# Altium PCB BMS.PcbDoc (part 2 of 2)
Units mil, origin at the board's own origin, x right, y up, seen from the top; angles counter-clockwise.
Board outline 1940 x 2890 mil, 2 copper layers (Top Layer, Bottom Layer); 210 components, 157 nets, 682 pads, 299 vias.
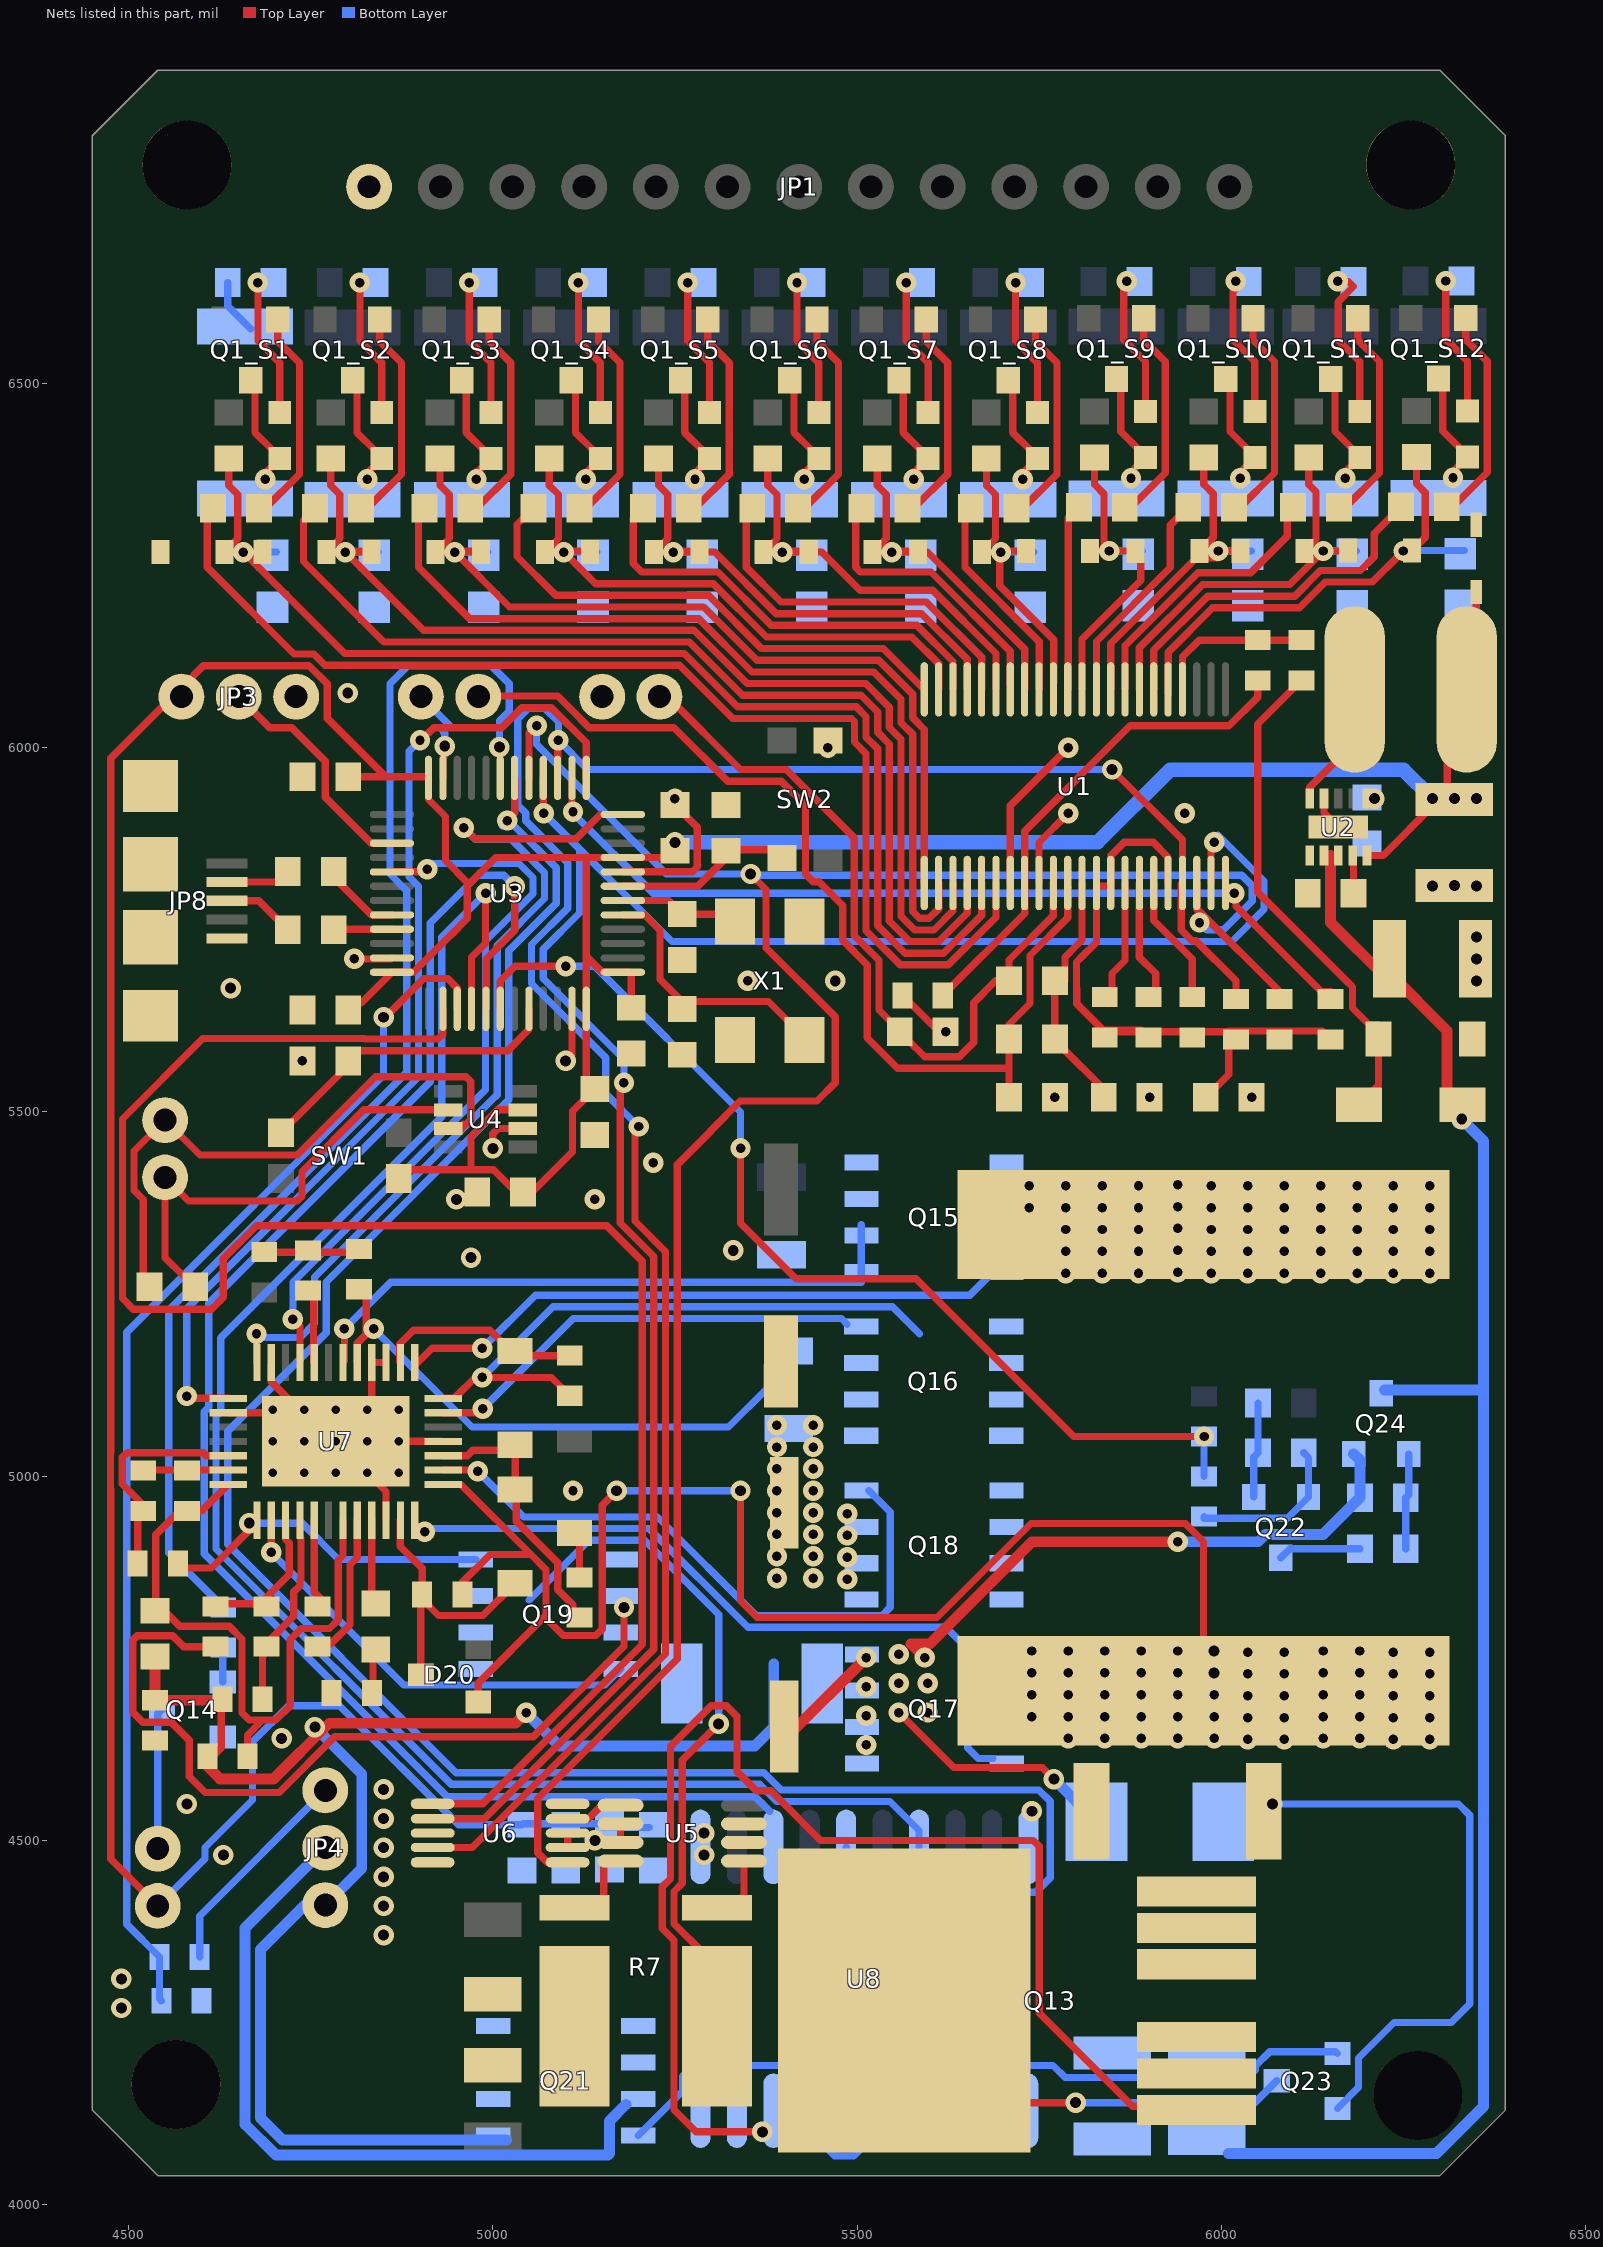
[diagram p2: the nets of this part, all layers, seen from the top]

## Via types
v1: diameter 28, hole 13, Top Layer to Bottom Layer, 232 vias
v2: diameter 28, hole 15, Top Layer to Bottom Layer, 52 vias
v3: diameter 23.62, hole 11.81, Top Layer to Bottom Layer, 15 vias

## Nets (pads, with @x,y where several pads share a name; then routed paths per layer and width w, separated by ;. In a path a pad name is that pad's centre, name@x,y a point inside that pad or via, vN(x,y) a via of type N, cw(c..) or ccw(c..) an arc to the next point about the centre after c; other vN are vias at no path point) (continued)
GND: C1.1 C1_S1.2 C1_S2.2 C1_S3.2 C1_S4.2 C1_S5.2 C1_S6.2 C1_S7.2 C1_S8.2 C1_S9.2 C1_S10.2 C1_S11.2 C1_S12.2 C3.1 C4.1 C5.1 C6.2 C7.2 C8.2 C9.1 C10.2 C11.1 C12.1 C13.1 C14.1 C22.1 C23.2 C24.2 C25.1 C26.1 C30.1 C31.1 C33.2 C34.2 C35.1 C37.2 C41.1 C42.1 C43.1 C45.2 C46.1 C47.1 D1.2 D1_S1.2 D5.2 D17.2 JP1.1 JP3.3 JP6.1 JP7.1 JP8.GND JP8.MT1 JP8.MT2 JP8.P$1 JP8.P$2 pad.2@4565,4165 pad.2@4580,6800 pad.2@6260,6800 Q14.3 Q18.1 Q22.3 R5.2 R11.1 R13_S1.2 R14_S1.1 R49.2 R51.1 R53.1 R64.1 R66.1 SW2.4 U1.29 U1.31 U2.1 U2.9 U2.11 U3.8 U3.23 U3.35 U3.47 U4.2 U5.2 U5.3 U6.4 U6.5 U6.7 U7.3 U7.4 U7.11 U7.14 U7.29 U7.35 U7.39 U8.1 U8.10 X1.2 | length 2191.8
  Top Layer w10: U7.14@4636.8,5087.13 U7.39@4738.36,5087.13 ; C42.1@4686.26,5307.5 4809.25,5307.5 C34.2@4816.26,5314.51 ; U7.11@4695.85,5153.08 4695.85,5129.64 U7.39@4738.36,5087.13 ; U7.39@4743.31,5047.76 U7.39@4777.73,5047.76 ; v1(4810,5710) 4860.12,5710 U3.35@4861.54,5711.42 ; U7.29@4853.33,4939.49 4853.33,4978.86 v3(4827.74,5004.45) v3(4784.43,5047.76) ; U7.3@4853.33,5156.02 U7.4@4833.65,5156.02 4833.65,5096.97 v3(4827.74,5091.06) v3(4784.43,5047.76) ; U7.35@4929.13,5047.76 v3(4871.05,5047.76) v3(4827.74,5047.76) v3(4784.43,5047.76) ; U3.23@4931.42,5958.47 4931.42,5986.89 4934,5989.47 v2(4934,6002.2) ; v2(5000,5450) 5000,5470 5007.2,5477.2 U4.2@5041.18,5477.2 ; v2(5100,5570) 5108.58,5578.58 U3.47@5108.58,5641.54 ; D17.2@5112.07,4922.01 5119.08,4915 C35.1@5119.08,4861.14 ; U3.8@5178.46,5829.53 5273.98,5829.53 5280.69,5836.23 5280.69,5890.81 C47.1@5250,5921.5 ; R11.1@5562.44,5660 5612.44,5610 v1(5621.5,5610) ; U1.29@5710.33,5814.25 5710.33,5920.33 v1(5790,6000) ; U1.31@5749.78,5814.25 5749.78,5869.78 v1(5790,5910) ; U2.9@6140.94,5930 6140.94,5910.71 U2.11@6160.63,5891.02 ; U7.39@4738.36,5087.13 U7.39@4777.73,5047.76 ; U7.39@4777.73,5047.76 v3(4784.43,5047.76)
  Bottom Layer w10: R14_S1.1@4636,6638.5 4636,6606.22 R13_S1.2@4667.5,6574.72 ; JP7.1@4901.26,6070 4940,6031.26 4931.42,6022.68 4934,6020.1 v2(4934,6002.2) ; R51.1@5976.26,4944.46 5976.26,4942.39 6090.69,4942.39 Q22.3@6119.69,4971.39 6119.69,5025.51 R66.1@6113.19,5032.02
  other v1: 5486.26,4858.59 5390,4860 5440,4860 5486.26,4888.59 5390,4890 5440,4890 5486.26,4918.59 5390,4920 5440,4920 5486.26,4948.59 5390,4950 5440,4950 5110,4980 5390,4980 5440,4980 5390,5010 5440,5010 5390,5040 5440,5040 5390,5070 5440,5070 5140,5380 5220,5430 5771.5,5520 5901.5,5520 6041.5,5520 4738.5,5570 5350,5680 5950,5910 5250,5930 5460,6000
  other v2: 4490,4270 4490,4310 4850,4370 4850,4410 4850,4450 4630,4480 5290,4480 4850,4490 5290,4510 4850,4530 5740,4540 4580,4550 4850,4570 4710,4640 4970,5300 5330,5310 4950,5380 4640,5670 5470,5680 6350,5680 6350,5710 6350,5740 6290,5810 6350,5810 6320,5810.94 4800.83,6075
  other v3: 4697.82,5004.45 4741.13,5004.45 4784.43,5004.45 4871.05,5004.45 4697.82,5047.76 4741.13,5047.76 4697.82,5091.06 4741.13,5091.06 4784.43,5091.06 4871.05,5091.06
L+: Q13.3 R68.1
LOAD_GATE: Q13.1 U8.18 | length 1795.6
  Top Layer w10: v2(5370,4100) 5278.77,4100 5248.61,4130.17 5248.61,4363.05 5232.61,4379.05 5232.61,4436.46 5244,4447.85 5244,4629.36 5299.64,4685 5320.36,4685 5335,4670.36 5335,4595 5361.76,4568.24 5381.76,4568.24 5450,4500 5741.93,4500 5750,4491.93 5750,4262.96 5877.96,4135 Q13.1@5966.06,4135
NetC1_S1_1: C1_S1.1 D1_S1.1 D1_S2.2 R1_S1.1 U1.27 | length 1705.3
  Top Layer w10: R1_S1.1@4637.5,6397.01 4637.5,6359.83 4638.14,6359.19 4638.27,6359.19 4650,6347.46 4650,6287.11 D1_S1.1@4631.39,6268.5 v1(4657.5,6268.5) ; D1_S2.2@4683.6,6268.5 v1(4657.5,6268.5) ; U1.27@5670.96,5814.25 5670.96,5770.11 5618.7,5717.85 5565.74,5717.85 5528.22,5755.37 5528.22,5998.49 5512.3,6014.42 5512.3,6042.45 5498.75,6056 5335.95,6056 5262.79,6129.17 4796.83,6129.17 v1(4657.5,6268.5)
  Bottom Layer w10: v1(4657.5,6268.5) C1_S1.1@4702.93,6268.5
NetC1_S2_1: C1_S2.1 D1_S2.1 D1_S3.2 R1_S2.1 U1.25 | length 1558.6
  Top Layer w10: R1_S2.1@4777.5,6397.01 4777.5,6359.83 4778.14,6359.19 4778.27,6359.19 4790,6347.46 4790,6287.11 D1_S2.1@4771.39,6268.5 v1(4797.5,6268.5) ; D1_S3.2@4832.1,6270 4798.99,6270 v1(4797.5,6268.5) ; D1_S3.2@4833.6,6268.5 v1(4797.5,6268.5) ; U1.25@5631.59,5791.37 U1.25@5631.59,5814.25 5631.59,5776 5605.44,5749.85 5579,5749.85 5560.22,5768.63 5560.22,6011.75 5544.3,6027.67 5544.3,6055.7 5512,6088 5349.21,6088 5276.04,6161.17 4904.83,6161.17 v1(4797.5,6268.5)
  Bottom Layer w10: v1@4802.93,6268.5 C1_S2.1@4842.93,6268.5
NetC1_S3_1: C1_S3.1 D1_S3.1 D1_S4.2 R1_S3.1 U1.23 | length 1254.2
  Top Layer w10: R1_S3.1@4927.5,6397.01 4927.5,6359.83 4928.14,6359.19 4928.27,6359.19 4940,6347.46 4940,6287.11 D1_S3.1@4921.39,6268.5 v1(4947.5,6268.5) ; D1_S4.2@4982.1,6270 4948.99,6270 v1(4947.5,6268.5) ; D1_S4.2@4983.6,6268.5 v1(4947.5,6268.5) ; U1.23@5592.22,5814.25 5592.22,6025 5576.3,6040.93 5576.3,6073.29 5529.59,6120 5362.46,6120 5289.3,6193.17 5022.83,6193.17 v1(4947.5,6268.5)
  Bottom Layer w10: v1@4952.93,6268.5 C1_S3.1@4992.93,6268.5
NetC1_S4_1: C1_S4.1 D1_S4.1 D1_S5.2 R1_S4.1 U1.21 | length 856
  Top Layer w10: R1_S4.1@5077.5,6397.01 5077.5,6359.83 5078.14,6359.19 5078.27,6359.19 5090,6347.46 5090,6287.11 D1_S4.1@5071.39,6268.5 v1(5097.5,6268.5) ; D1_S5.2@5132.1,6270 5098.99,6270 v1(5097.5,6268.5) ; U1.21@5611.91,6080 5611.91,6115.31 5575.22,6152 5375.72,6152 5302.55,6225.17 5140.83,6225.17 v1(5097.5,6268.5)
  Bottom Layer w10: v1@5102.93,6268.5 C1_S4.1@5142.93,6268.5
NetC1_S5_1: C1_S5.1 D1_S5.1 D1_S6.2 R1_S5.1 U1.19 | length 748.8
  Top Layer w10: R1_S5.1@5227.5,6397.01 5227.5,6359.83 5228.14,6359.19 5228.27,6359.19 5240,6347.46 5240,6287.11 D1_S5.1@5221.39,6268.5 v1(5247.5,6268.5) ; D1_S6.2@5282.1,6270 5248.99,6270 v1(5247.5,6268.5) ; U1.19@5651.28,6080 5651.28,6121.2 5588.47,6184 5388.97,6184 5304.47,6268.5 v1(5247.5,6268.5)
  Bottom Layer w10: v1@5252.93,6268.5 C1_S5.1@5292.93,6268.5
NetC1_S6_1: C1_S6.1 D1_S6.1 D1_S7.2 R1_S6.1 U1.17 | length 642.9
  Top Layer w10: R1_S6.1@5377.5,6397.01 5377.5,6359.83 5378.14,6359.19 5378.27,6359.19 5390,6347.46 5390,6287.11 D1_S6.1@5371.39,6268.5 v1(5397.5,6268.5) ; D1_S7.2@5432.1,6270 5398.99,6270 v1(5397.5,6268.5) ; U1.17@5690.65,6080 5690.65,6129.35 5604,6216 5504,6216 5451.5,6268.5 v1(5397.5,6268.5)
  Bottom Layer w10: v1@5402.93,6268.5 C1_S6.1@5442.93,6268.5
NetC1_S7_1: C1_S7.1 D1_S7.1 D1_S8.2 R1_S7.1 U1.15 | length 535.8
  Top Layer w10: R1_S7.1@5527.5,6397.01 5527.5,6359.83 5528.14,6359.19 5528.27,6359.19 5540,6347.46 5540,6287.11 D1_S7.1@5521.39,6268.5 v1(5547.5,6268.5) ; D1_S8.2@5582.1,6270 5548.99,6270 v1(5547.5,6268.5) ; U1.15@5730.02,6080 5730.02,6135.24 5596.75,6268.5 v1(5547.5,6268.5)
  Bottom Layer w10: v1@5552.93,6268.5 C1_S7.1@5592.93,6268.5
NetC1_S8_1: C1_S8.1 D1_S8.1 D1_S9.2 R1_S8.1 U1.13 | length 452.6
  Top Layer w10: R1_S8.1@5677.5,6397.01 5677.5,6359.83 5678.14,6359.19 5678.27,6359.19 5690,6347.46 5690,6287.11 D1_S8.1@5671.39,6268.5 v1(5697.5,6268.5) ; D1_S9.2@5732.1,6270 5698.99,6270 v1(5697.5,6268.5) ; U1.13@5770,6090 5770,6148.23 5696,6222.23 5696,6267.01 v1(5697.5,6268.5)
  Bottom Layer w10: v1@5702.93,6268.5 C1_S8.1@5742.93,6268.5
NetC1_S9_1: C1_S9.1 D1_S9.1 D1_S10.2 R1_S9.1 U1.11 | length 526.9
  Top Layer w10: U1.11@5808.76,6080 5808.76,6148.76 5889.5,6229.5 5889.5,6262.6 D1_S10.2@5882.1,6270 v1(5846,6270) D1_S9.1@5819.9,6270 5838.78,6270 5838.78,6348.68 5826.78,6360.69 5826.64,6360.69 5826,6361.33 R1_S9.1@5826,6398.5
  Bottom Layer w10: C1_S9.1@5886,6270 v1(5846,6270) C1_S9.1@5891.43,6270
NetC1_S10_1: C1_S10.1 D1_S10.1 D1_S11.2 R1_S10.1 U1.9 | length 507
  Top Layer w10: U1.9@5848.13,6080 5848.13,6142.87 5965.5,6260.24 5996,6260.24 v1(5996,6270) ; R1_S10.1@5976,6398.5 5976,6361.33 5976.64,6360.69 5976.78,6360.69 5988.78,6348.68 5988.78,6288.88 D1_S10.1@5969.9,6270 v1(5996,6270) ; D1_S11.2@6026.1,6270 v1(5996,6270)
  Bottom Layer w10: v1@6001.43,6270 C1_S10.1@6041.43,6270
NetC1_S11_1: C1_S11.1 D1_S11.1 D1_S12.2 R1_S11.1 U1.7 | length 604.4
  Top Layer w10: U1.7@5887.5,6080 5887.5,6136.99 5974.51,6224 6094,6224 v1(6140,6270) ; R1_S11.1@6120,6398.5 6120,6361.33 6120.64,6360.69 6120.78,6360.69 6130,6351.46 6130,6286.1 D1_S11.1@6113.9,6270 v1(6140,6270) ; D1_S12.2@6174.1,6270.63 6173.47,6270 v1(6140,6270)
  Bottom Layer w10: v1@6145.43,6270 C1_S11.1@6185.43,6270
NetC1_S12_1: C1_S12.1 D1_S12.1 R1_S12.1 U1.5 | length 687.4
  Top Layer w10: U1.5@5926.79,6073.21 5926.94,6073.37 5926.94,6131.18 5987.76,6192 6107.25,6192 6142.55,6227.29 6207.29,6227.29 6243.5,6263.5 6254.77,6263.5 D1_S12.1@6261.9,6270.63 ; v1(6250,6270) 6261.27,6270 D1_S12.1@6261.9,6270.63 ; R1_S12.1@6268,6399.13 6268,6361.96 6268.64,6361.32 6268.78,6361.32 6280,6350.09 6280,6288.73 D1_S12.1@6261.9,6270.63
  Bottom Layer w10: v1@6250,6270.63 C1_S12.1@6333.43,6270.63
NetC2_2: C2.2 R8.1 U1.4 | length 213.2
  Top Layer w10: U1.4@5946.55,6070.35 U1.4@5946.55,6080 5946.55,6124.64 5969.47,6147.56 R8.1@6096,6147.56
NetC5_2: C5.2 R4.2 R6.2 U1.34 | length 358.2
  Top Layer w10: U1.34@5808.76,5814.25 5808.76,5735.86 5801.23,5728.34 5801.1,5728.34 5785.28,5712.52 5785.28,5680 R6.2@5771.5,5680 5771.5,5598.5 5848.5,5521.5 C5.2@5838.5,5521.5
NetC8_1: C8.1 U2.6
  other v2: 6210,5930
NetC10_1: C10.1 U2.4 | length 52.5
  Top Layer w10: U2.4@6180.31,5852.05 6181.5,5850.87 C10.1@6181.5,5800
NetC23_1: C23.1 U3.5 X1.1 | length 372
  Top Layer w10: U3.5@5178.46,5770.47 5208.06,5770.47 5229.41,5749.13 5229.41,5730.87 5229.31,5730.78 5229.31,5686.23 5229.41,5686.14 5229.41,5682.09 C23.1@5260,5651.5 ; C23.1@5260,5641.5 C23.1@5260,5651.5 ; X1.1@5427.5,5598.5 5427.5,5602.5 5378.5,5651.5 C23.1@5260,5651.5
NetC24_1: C24.1 U3.6 X1.3 | length 165.9
  Top Layer w10: U3.6@5178.46,5790.16 5241.34,5790.16 C24.1@5260,5771.5 5322.5,5771.5 X1.3@5332.5,5761.5
NetC25_2: C25.2 SW2.1 U3.7 | length 246.6
  Top Layer w10: U3.7@5178.46,5809.84 5281.34,5809.84 5315,5843.5 5315,5850.75 5324.25,5860 SW2.1@5400,5860
NetC32_1: C32.1 D3.1 U7.2 | length 289.9
  Top Layer w10: U7.2@4873.02,5156.02 4872.07,5156.97 4872.07,5181.46 4891.1,5200.49 4995.93,5200.49 5010.57,5185.85 5010.57,5171.81 D3.1@5030.57,5171.81 5036.89,5165.49 C32.1@5105.57,5165.49
NetC32_2: C32.2 L3.1 Q15.1 Q16.3 U7.38 | length 852.5
  Top Layer w10: U7.38@4932.07,5106.81 4949.08,5106.81 4949.08,5108.94 4975.63,5135.49 5080.46,5135.49 C32.2@5105.57,5110.37
  Bottom Layer w10: v1(4985.57,5135.49) 5082.47,5232.39 5548.68,5232.39 5585.57,5195.49
  other v1: 5786.26,5278.59 5836.26,5278.59 5886.26,5278.59 5986.26,5278.59 6036.26,5278.59 6086.26,5278.59 6136.26,5278.59 6186.26,5278.59 6236.26,5278.59 6286.26,5278.59 5940,5280 5786.26,5308.59 5836.26,5308.59 5886.26,5308.59 5986.26,5308.59 6036.26,5308.59 6086.26,5308.59 6136.26,5308.59 6186.26,5308.59 6236.26,5308.59 6286.26,5308.59 5940,5310 5786.26,5338.59 5836.26,5338.59 5886.26,5338.59 5986.26,5338.59 6036.26,5338.59 6086.26,5338.59 6136.26,5338.59 6186.26,5338.59 6236.26,5338.59 6286.26,5338.59 5940,5340 5736.26,5368.59 5786.26,5368.59 5836.26,5368.59 5886.26,5368.59 5986.26,5368.59 6036.26,5368.59 6086.26,5368.59 6136.26,5368.59 6186.26,5368.59 6236.26,5368.59 6286.26,5368.59 5940,5370 5736.26,5398.59 5786.26,5398.59 5836.26,5398.59 5886.26,5398.59 5986.26,5398.59 6036.26,5398.59 6086.26,5398.59 6136.26,5398.59 6186.26,5398.59 6236.26,5398.59 6286.26,5398.59 5940,5400
NetC34_1: C34.1 Q16.1 R53.2 U7.5 | length 757.1
  Top Layer w10: U7.5@4813.96,5156.02 4813.96,5182.41 4826.26,5194.71 4826.26,5243.88 C34.1@4816.26,5253.88
  Bottom Layer w10: v1(4836.26,5202.39) 4971.26,5067.39 5323.56,5067.39 5376.26,5120.08 5376.26,5152.39
NetC35_2: C35.2 D3.2 D19.2 U7.34 | length 378.4
  Top Layer w10: U7.34@4932.07,5028.07 4965.09,5028.07 4972.51,5035.49 5023,5035.49 D3.2@5030.57,5043.07 D19.2@5030.57,4981.81 5032.01,4980.37 5032.01,4938.14 5089.08,4881.07 5089.08,4844.09 5109.59,4823.58 5109.59,4815.52 C35.2@5119.08,4806.02
NetC36_1: C36.1 U7.24 | length 121
  Top Layer w10: U7.24@4754.91,4939.49 4754.91,4840.67 C36.1@4770.57,4825
NetC36_2: C36.2 U7.27 | length 191.6
  Top Layer w10: C36.2@4770.57,4769.88 4777.5,4769.88 4803.8,4796.18 4803.8,4878.1 4813.96,4888.27 U7.27@4813.96,4939.49
NetC37_1: C37.1 R54.2 | length 73.4
  Top Layer w10: R54.2@4832.07,4767.44 4835.57,4763.94 C37.1@4835.57,4695.49
NetC38_1: C38.1 R59.1 U7.22 | length 183.1
  Top Layer w10: R59.1@4630.57,4825 4680.5,4825 4720.57,4865.08 4720.57,4908.07 4715.54,4913.1 U7.22@4715.54,4939.49
NetC38_2: C38.2 R58.1 U7.23 | length 268
  Top Layer w10: R58.1@4683.82,4693.88 4683.82,4752.89 4689.08,4758.15 4689.08,4770.15 4726.85,4807.92 4726.85,4841.35 4735.22,4849.72 4735.22,4857.1 4736.57,4858.45 4736.57,4914.69 4735.22,4916.05 U7.23@4735.22,4939.49
NetC39_1: C39.1 R56.2 R57.1 U7.19 U7.26 | length 914
  Top Layer w10: U7.19@4636.8,4988.7 4600.54,4952.44 4570,4952.44 4537.22,4919.66 4537.22,4816.34 C39.1@4536.26,4815.38 4548.85,4815.38 4570.35,4793.88 4638.27,4793.88 4655.57,4776.58 4655.57,4675.07 4665.48,4665.17 4683.82,4665.17 ; R57.1@4663.13,4615.49 4663.13,4644.48 4683.82,4665.17 ; U7.26@4794.28,4939.49 4794.28,4891.21 4787.8,4884.73 4787.8,4802.81 4775.79,4790.8 4736.81,4790.8 4721.73,4775.73 4721.73,4684.74 4702.15,4665.17 4683.82,4665.17
NetC40_1: C40.1 D19.1 D20.3 U7.30 | length 386.8
  Top Layer w10: U7.30@4873.02,4939.49 4873.02,4903.58 4903.02,4873.58 C40.1@4903.02,4837.44 ; D20.3@4901.2,4727.44 4901.2,4835.63 C40.1@4903.02,4837.44 ; D19.1@5030.57,4853.07 4986.23,4808.72 4925.35,4808.72 4903.02,4831.06 C40.1@4903.02,4837.44
NetC40_2: C40.2 D4.2 D20.1 L3.2 Q17.1 Q18.3 U7.32 | length 2300.9
  Top Layer w10: U7.32@4932.07,4988.7 4956.09,4988.7 5052.4,4892.39 ; C40.2@4958.13,4837.44 4958.13,4854.26 4996.26,4892.39 5052.4,4892.39 ; D20.1@4979.94,4690.04 4979.94,4715.82 5073.08,4808.96 ; v2(5170,4980) 5150,4960 5150,4789.89 5141.35,4781.24 5096.81,4781.24 5073.08,4804.97 5073.08,4808.96 ; v2(5340,4980) 5340,4828.53 5362.63,4805.89 5609.73,4805.89 5738.84,4935 5950.36,4935 5975.57,4909.78 L3.2@5975.57,4705.49 ; v1(5740,4700) 5964.85,4700 L3.2@5956.26,4708.59 ; 5052.4,4892.39 5073.08,4871.71 5073.08,4808.96
  Bottom Layer w10: v2(5170,4980) v2(5340,4980)
  other v1: 6036.26,4638.59 6086.26,4638.59 6236.26,4638.59 6286.26,4638.59 5790,4640 5840,4640 5890,4640 5940,4640 5990,4640 6140,4640 6190,4640 6036.26,4668.59 6086.26,4668.59 6236.26,4668.59 6286.26,4668.59 5740,4670 5790,4670 5840,4670 5890,4670 5940,4670 5990,4670 6140,4670 6190,4670 6036.26,4698.59 6086.26,4698.59 6236.26,4698.59 6286.26,4698.59 5790,4700 5840,4700 5890,4700 5940,4700 5990,4700 6140,4700 6190,4700 6036.26,4728.59 6086.26,4728.59 6236.26,4728.59 6286.26,4728.59 5740,4730 5790,4730 5840,4730 5890,4730 5940,4730 6140,4730 6190,4730 6036.26,4758.59 6086.26,4758.59 6236.26,4758.59 6286.26,4758.59 5740,4760 5790,4760 5840,4760 5890,4760 5940,4760 6140,4760 6190,4760
  other v2: 5990,4730 5990,4760
NetD1_1: D1.1 L1.2 R8.2 | length 674.7
  Top Layer w10: R8.2@6110,6092.44 6050,6032.44 6050,5801.56 6172,5679.56 6172.27,5679.56 6178.72,5673.12 6178.72,5672.84 6180,5671.56 6180,5642.63 6202.63,5620 D1.1@6215.63,5620 ; L1.2@6189.13,5510 6215.63,5536.5 D1.1@6215.63,5600
NetD2_S1_1: D2_S1.1 R14_S1.2 | length 190.9
  Top Layer w10: v1(4677.5,6638.5) 4677.5,6558.5 4707.5,6528.5 D2_S1.1@4707.5,6460
NetD2_S1_2: D2_S1.2 Q1_S1.2 R13_S1.1 | length 170.2
  Top Layer w10: Q1_S1.2@4667.49,6504.5 4673.5,6504.5 4673.5,6432.5 4697.5,6408.5 D2_S1.2@4697.5,6387.01 ; v1(4687.5,6368.5) 4687.5,6377.01 D2_S1.2@4697.5,6387.01 ; D2_S1.2@4707.5,6397.01 D2_S1.2@4697.5,6387.01
NetD2_S2_1: D2_S2.1 R14_S2.2 | length 190.9
  Top Layer w10: v1(4817.5,6638.5) 4817.5,6558.5 4847.5,6528.5 D2_S2.1@4847.5,6460
NetD2_S2_2: D2_S2.2 Q1_S2.2 R13_S2.1 | length 170.2
  Top Layer w10: Q1_S2.2@4807.5,6504.5 4813.5,6504.5 4813.5,6432.5 4837.5,6408.5 D2_S2.2@4837.5,6387.01 ; v1(4827.5,6368.5) 4827.5,6377.01 D2_S2.2@4837.5,6387.01 ; D2_S2.2@4847.5,6397.01 D2_S2.2@4837.5,6387.01
NetD2_S3_1: D2_S3.1 R14_S3.2 | length 190.9
  Top Layer w10: v1(4967.5,6638.5) 4967.5,6558.5 4997.5,6528.5 D2_S3.1@4997.5,6460
NetD2_S3_2: D2_S3.2 Q1_S3.2 R13_S3.1 | length 178.7
  Top Layer w10: Q1_S3.2@4957.5,6504.5 4963.5,6504.5 4963.5,6432.5 4987.5,6408.5 D2_S3.2@4987.5,6387.01 ; v1(4977.5,6368.5) 4977.5,6377.01 D2_S3.2@4987.5,6387.01 ; v1@4978,6370.63 v1@4978,6379.13 ; D2_S3.2@4997.5,6397.01 D2_S3.2@4987.5,6387.01
NetD2_S4_1: D2_S4.1 R14_S4.2 | length 190.9
  Top Layer w10: v1(5117.5,6638.5) 5117.5,6558.5 5147.5,6528.5 D2_S4.1@5147.5,6460
NetD2_S4_2: D2_S4.2 Q1_S4.2 R13_S4.1 | length 178.7
  Top Layer w10: Q1_S4.2@5107.5,6504.5 5113.5,6504.5 5113.5,6432.5 5137.5,6408.5 D2_S4.2@5137.5,6387.01 ; D2_S4.2@5147.5,6397.01 D2_S4.2@5137.5,6387.01 ; v1@5127.5,6377.01 v1(5127.5,6368.5) v1@5127.5,6377.01 ; v1@5127.5,6377.01 D2_S4.2@5137.5,6387.01
NetD2_S5_1: D2_S5.1 R14_S5.2 | length 190.9
  Top Layer w10: v1(5267.5,6638.5) 5267.5,6558.5 5297.5,6528.5 D2_S5.1@5297.5,6460
NetD2_S5_2: D2_S5.2 Q1_S5.2 R13_S5.1 | length 170.2
  Top Layer w10: Q1_S5.2@5257.5,6504.5 5263.5,6504.5 5263.5,6432.5 5287.5,6408.5 D2_S5.2@5287.5,6387.01 ; v1(5277.5,6368.5) 5277.5,6377.01 D2_S5.2@5287.5,6387.01 ; D2_S5.2@5297.5,6397.01 D2_S5.2@5287.5,6387.01
NetD2_S6_1: D2_S6.1 R14_S6.2 | length 190.9
  Top Layer w10: v1(5417.5,6638.5) 5417.5,6558.5 5447.5,6528.5 D2_S6.1@5447.5,6460
NetD2_S6_2: D2_S6.2 Q1_S6.2 R13_S6.1 | length 178.7
  Top Layer w10: Q1_S6.2@5407.5,6504.5 5413.5,6504.5 5413.5,6432.5 5437.5,6408.5 D2_S6.2@5437.5,6387.01 ; v1@5426,6370 v1@5426,6378.5 ; v1(5427.5,6368.5) 5427.5,6377.01 D2_S6.2@5437.5,6387.01 ; D2_S6.2@5447.5,6397.01 D2_S6.2@5437.5,6387.01
NetD2_S7_1: D2_S7.1 R14_S7.2 | length 190.9
  Top Layer w10: v1(5567.5,6638.5) 5567.5,6558.5 5597.5,6528.5 D2_S7.1@5597.5,6460
NetD2_S7_2: D2_S7.2 Q1_S7.2 R13_S7.1 | length 187.2
  Top Layer w10: Q1_S7.2@5557.5,6504.5 5563.5,6504.5 5563.5,6432.5 5587.5,6408.5 D2_S7.2@5587.5,6387.01 ; v1@5576,6370 v1@5576,6378.5 ; D2_S7.2@5597.5,6397.01 D2_S7.2@5587.5,6387.01 ; v1@5577.5,6377.01 v1(5577.5,6368.5) v1@5577.5,6377.01 ; v1@5577.5,6377.01 D2_S7.2@5587.5,6387.01
NetD2_S8_1: D2_S8.1 R14_S8.2 | length 190.9
  Top Layer w10: v1(5717.5,6638.5) 5717.5,6558.5 5747.5,6528.5 D2_S8.1@5747.5,6460
NetD2_S8_2: D2_S8.2 Q1_S8.2 R13_S8.1 | length 178.7
  Top Layer w10: Q1_S8.2@5707.5,6504.5 5713.5,6504.5 5713.5,6432.5 5737.5,6408.5 D2_S8.2@5737.5,6387.01 ; v1@5726,6370 v1@5726,6378.5 ; v1(5727.5,6368.5) 5727.5,6377.01 D2_S8.2@5737.5,6387.01 ; D2_S8.2@5747.5,6397.01 D2_S8.2@5737.5,6387.01
NetD2_S9_1: D2_S9.1 R14_S9.2 | length 194.8
  Top Layer w10: v1(5870,6640) 5866.14,6640 5866.07,6639.93 5866.07,6559.93 5896,6530 D2_S9.1@5896,6461.5
NetD2_S9_2: D2_S9.2 Q1_S9.2 R13_S9.1 | length 170.2
  Top Layer w10: Q1_S9.2@5856,6506 5862,6506 5862,6434 5886,6410 D2_S9.2@5886,6388.5 ; v1(5876,6370) 5876,6378.5 D2_S9.2@5886,6388.5 ; D2_S9.2@5896,6398.5 D2_S9.2@5886,6388.5
NetD2_S10_1: D2_S10.1 R14_S10.2 | length 192.6
  Top Layer w10: v1(6020,6640) 6020,6630 6016,6626 6016,6560 6046,6530 D2_S10.1@6046,6461.5
NetD2_S10_2: D2_S10.2 Q1_S10.2 R13_S10.1 | length 170.2
  Top Layer w10: Q1_S10.2@6006,6506 6012,6506 6012,6434 6036,6410 D2_S10.2@6036,6388.5 ; v1(6026,6370) 6026,6378.5 D2_S10.2@6036,6388.5 ; D2_S10.2@6046,6398.5 D2_S10.2@6036,6388.5
NetD2_S11_1: D2_S11.1 R14_S11.2 | length 217.2
  Top Layer w10: v1(6160,6640) 6174.52,6640 6181.5,6633.02 6160.4,6611.93 6160.4,6560.4 6160,6560 6190,6530 D2_S11.1@6190,6461.5
NetD2_S11_2: D2_S11.2 Q1_S11.2 R13_S11.1 | length 170.2
  Top Layer w10: Q1_S11.2@6150,6506 6156,6506 6156,6434 6180,6410 D2_S11.2@6180,6388.5 ; v1(6170,6370) 6170,6378.5 D2_S11.2@6180,6388.5 ; D2_S11.2@6190,6398.5 D2_S11.2@6180,6388.5
NetD2_S12_1: D2_S12.1 R14_S12.2 | length 190.9
  Top Layer w10: v1(6308,6640.63) 6308,6560.63 6338,6530.63 D2_S12.1@6338,6462.13
NetD2_S12_2: D2_S12.2 Q1_S12.2 R13_S12.1 | length 170.2
  Top Layer w10: Q1_S12.2@6298,6506.63 6304,6506.63 6304,6434.63 6328,6410.63 D2_S12.2@6328,6389.13 ; v1(6318,6370.63) 6318,6379.13 D2_S12.2@6328,6389.13 ; D2_S12.2@6338,6399.13 D2_S12.2@6328,6389.13
NetF1_2: F1.2 F2.2 R7.1
NetJP2_1: JP2.1 R17.2 U4.7 | length 860.2
  Top Layer w10: R17.2@4528.5,5260 4530,5261.5 4520,5271.5 4520,5379.9 4507.5,5392.4 4507.5,5446.24 JP2.1@4550,5488.74 4597.93,5440.81 4731.56,5440.81 4839,5548.24 4963.06,5548.24 4969.5,5541.8 ; U4.7@4938.82,5477.2 4957.33,5477.2 4959,5478.88 4959,5482.94 4963.06,5482.94 4969.5,5489.38 4969.5,5541.8 ; 4969.5,5514.97 4969.5,5541.8
NetJP2_2: JP2.2 R17.1 U4.6 | length 639
  Top Layer w10: R17.1@4578.78,5274.69 4578.78,5271.22 R17.1@4580.75,5269.25 ; R17.1@4588.57,5274.69 4575.31,5274.69 4550,5300 JP2.2@4550,5410 4582.18,5377.82 4731.56,5377.82 4738.01,5384.26 4738.01,5418.01 4822.8,5502.8 U4.6@4938.82,5502.8
NetJP4_1: JP4.1 R62.2 | length 300.2
  Bottom Layer w10: R62.2@4597.56,4340 4597.56,4396.3 JP4.1@4770,4568.74
NetJP5_1: JP5.1 Q14.2 | length 172.5
  Bottom Layer w10: JP5.1@4540,4510 4540,4674 Q14.2@4546,4680
NetJP8_2: JP8.D- R15.2 | length 89.5
  Top Layer w10: JP8.D-@4635,5815.59 4704.09,5815.59 R15.2@4718.5,5830
NetJP8_3: JP8.D+ R16.2 | length 100.1
  Top Layer w10: JP8.D+@4635,5790 4678.5,5790 R16.2@4718.5,5750
NetL2_1: L2.1 U2.10 | length 182.3
  Top Layer w10: U2.10@6121.26,5930 6121.26,5945.56 6154.89,5979.19 6173.23,5979.19 L2.1@6173.23,6080
NetQ1_S1_1: Q1_S1.1 R4_S1.2 | length 299.6
  Top Layer w10: R4_S1.2@4678.99,6328.5 4687.5,6328.5 4734.5,6375.5 4734.5,6528.5 4704.9,6558.1 Q1_S1.1@4704.9,6587.87
NetQ1_S2_1: Q1_S2.1 R4_S2.2 | length 299.6
  Top Layer w10: R4_S2.2@4818.99,6328.5 4827.5,6328.5 4874.5,6375.5 4874.5,6528.5 4844.9,6558.1 Q1_S2.1@4844.9,6587.87
NetQ1_S3_1: Q1_S3.1 R4_S3.2 | length 299.6
  Top Layer w10: R4_S3.2@4968.99,6328.5 4977.5,6328.5 5024.5,6375.5 5024.5,6528.5 4994.9,6558.1 Q1_S3.1@4994.9,6587.87
NetQ1_S4_1: Q1_S4.1 R4_S4.2 | length 299.6
  Top Layer w10: R4_S4.2@5118.99,6328.5 5127.5,6328.5 5174.5,6375.5 5174.5,6528.5 5144.9,6558.1 Q1_S4.1@5144.9,6587.87
NetQ1_S5_1: Q1_S5.1 R4_S5.2 | length 299.6
  Top Layer w10: R4_S5.2@5268.99,6328.5 5277.5,6328.5 5324.5,6375.5 5324.5,6528.5 5294.9,6558.1 Q1_S5.1@5294.9,6587.87
NetQ1_S6_1: Q1_S6.1 R4_S6.2 | length 299.6
  Top Layer w10: R4_S6.2@5418.99,6328.5 5427.5,6328.5 5474.5,6375.5 5474.5,6528.5 5444.9,6558.1 Q1_S6.1@5444.9,6587.87
NetQ1_S7_1: Q1_S7.1 R4_S7.2 | length 299.6
  Top Layer w10: R4_S7.2@5568.99,6328.5 5577.5,6328.5 5624.5,6375.5 5624.5,6528.5 5594.9,6558.1 Q1_S7.1@5594.9,6587.87
NetQ1_S8_1: Q1_S8.1 R4_S8.2 | length 299.6
  Top Layer w10: R4_S8.2@5718.99,6328.5 5727.5,6328.5 5774.5,6375.5 5774.5,6528.5 5744.9,6558.1 Q1_S8.1@5744.9,6587.87
NetQ1_S9_1: Q1_S9.1 R4_S9.2 | length 299.6
  Top Layer w10: R4_S9.2@5867.5,6330 5876,6330 5923,6377 5923,6530 5893.4,6559.6 Q1_S9.1@5893.4,6589.37
NetQ1_S10_1: Q1_S10.1 R4_S10.2 | length 299.6
  Top Layer w10: R4_S10.2@6017.5,6330 6026,6330 6073,6377 6073,6530 6043.4,6559.6 Q1_S10.1@6043.4,6589.37
NetQ1_S11_1: Q1_S11.1 R4_S11.2 | length 299.6
  Top Layer w10: R4_S11.2@6161.5,6330 6170,6330 6217,6377 6217,6530 6187.4,6559.6 Q1_S11.1@6187.4,6589.37
NetQ1_S12_1: Q1_S12.1 R4_S12.2 | length 299.6
  Top Layer w10: R4_S12.2@6309.5,6330.63 6318,6330.63 6365,6377.63 6365,6530.63 6335.4,6560.23 Q1_S12.1@6335.4,6590
NetQ14_1: Q14.1 R70.2 | length 47.7
  Bottom Layer w10: Q14.1@4629.37,4717.4 4629.37,4764.25 R70.2@4630,4764.88
NetQ15_1: Q15.2 U7.1 | length 865.7
  Top Layer w10: U7.1@4892.7,5156.02 4894.84,5153.88 4916.45,5175.49 v1(4985.57,5175.49)
  Bottom Layer w10: v1(4985.57,5175.49) 5058.47,5248.39 5654.76,5248.39 5686.87,5280.49 Q15.2@5705.08,5280.49
NetQ15_2: Q15.3 R52.1 U7.6 | length 862.4
  Top Layer w10: U7.6@4794.28,5156.02 4796.26,5158.01 v1(4796.26,5202.39)
  Bottom Layer w10: v1(4796.26,5202.39) 4859.91,5266.03 5505.75,5266.03 5505.75,5345.38
NetQ16_1: Q16.2 U7.37 | length 611
  Top Layer w10: U7.37@4932.07,5087.13 4981,5087.13 v1(4986.26,5092.39)
  Bottom Layer w10: v1(4986.26,5092.39) 5110.26,5216.39 5478.46,5216.39 Q16.2@5486.26,5208.59
NetQ17_1: Q17.2 U7.31 | length 992.1
  Bottom Layer w10: v1(4906.26,4923.88) 4910.4,4928.02 5214.69,4928.02 5350.24,4792.47 5622.16,4792.47 5651.76,4762.88 5651.76,4746.81 5651.76,4727.97 5651.76,4696.81 5651.76,4677.97 5651.76,4626.89 5666.26,4612.39 Q17.2@5686.26,4612.39
NetQ18_1: Q18.2 U7.33 | length 873.8
  Top Layer w10: U7.33@4932.07,5008.39 4977.87,5008.39 v1(4979.32,5006.94)
  Bottom Layer w10: v1(4979.32,5006.94) 5042.24,4944.02 5225.98,4944.02 5361.53,4808.47 5534.13,4808.47 5545.57,4819.92 5545.57,4950.74 Q18.2@5515.94,4980.37
NetQ19_1: Q19.2 U7.21 | length 609.2
  Top Layer w10: v1(4695.57,4895.49) 4695.57,4902.25 4695.85,4901.98 U7.21@4695.85,4939.49
  Bottom Layer w10: v1(4695.57,4895.49) 4877.6,4713.47 5153.55,4713.47 Q19.2@5175.57,4735.49
NetQ19_3: Q19.1 R59.2 R61.1 | length 1111.7
  Top Layer w10: R59.2@4619.08,4766.02 4575.58,4766.02 4560.5,4781.1 4512.02,4781.1 4505.57,4774.66 4505.57,4676.02 4519.55,4662.05 4558.53,4662.05 4583.24,4637.34 4583.24,4587.83 4605.29,4565.78 4706.63,4565.78 4783.15,4642.29 5055.63,4642.29 5180,4766.66 v2(5180,4820) ; R59.2@4627.03,4766.34 R59.2@4630.57,4769.88
NetQ22_1: Q22.1 R65.1 R66.2 | length 131.6
  Bottom Layer w10: Q22.1@6044.29,4971.39 6044.29,5026.11 R66.2@6050.2,5032.02 R65.1@6050.2,5100.52
NetQ22_2: Q22.2 R69.1 | length 113.7
  Bottom Layer w10: Q22.2@6081.69,4888.02 6094.2,4900.52 R69.1@6190.2,4900.52
NetQ23_3: Q23.3 R68.2 | length 801.2
  Bottom Layer w10: v2(6070,4550) 6325.56,4550 6341,4534.56 6341,4275.44 6315.56,4250 6237.01,4250 6188.37,4201.36 6188.37,4161 Q23.3@6159.37,4132
NetQ24_1: Q24.1 R67.1 R69.2 | length 131.6
  Bottom Layer w10: R69.2@6253.19,4900.52 R67.1@6253.19,4970.52 6257.09,4974.43 Q24.1@6257.09,5030.52
NetR1_2: R1.2 U1.41 U3.15 U6.6 | length 3144.6
  Top Layer w10: U6.6@4917.38,4490.32 4971.54,4490.32 5237,4755.78 5237,5308.25 5195,5350.25 5195,5475 v1(5200,5480) ; U3.15@5088.9,5958.47 5088.9,6008.9 v1(5090,6010) ; v2(5850,5970) 5946.55,5873.45 U1.41@5946.55,5814.25 5945,5812.7 5945,5749.64 5959.64,5735 5965,5735 6020,5680 R1.2@6020,5667.56
  Bottom Layer w10: v1(5200,5480) 5155,5525 5155,5574.39 5053,5676.39 5053,5729.76 5103,5779.76 5103,5841.64 5045,5899.64 5045,5910.36 5034,5921.36 5034,6039.36 5049.64,6055 5070.36,6055 5090,6035.36 v1(5090,6010) 5130,5970 v2(5850,5970)
NetR2_2: R2.2 U1.42 U3.17 U6.0 | length 3169.9
  Top Layer w10: U3.17@5049.53,5958.47 5049.53,6020.47 5059.06,6030 v1(5060,6030) ; U6.0@5102.62,4469.84 5074.81,4469.84 5061.5,4483.15 5061.5,4557.65 5253,4749.15 5253,5427.64 5299,5473.64 5299,5474.36 5339.64,5515 5445,5515 5470,5540 5470,5630.56 5375,5725.56 5375,5805.39 v2(5353.79,5826.6) ; U1.42@5966.24,5814.25 5966.24,5778.94 R2.2@6085.2,5659.98
  Bottom Layer w10: v1(5060,6030) 5060,6004.64 5238.04,5826.6 v2(5353.79,5826.6) v2@5343.4,5826.6 ; v2@5345,5825 6027.92,5825 6042.56,5810.36 6042.56,5789.64 6002.92,5750 5980,5750 v1(5970,5760)
NetR3_2: R3.2 U1.44 U3.14 | length 1203.8
  Top Layer w10: U3.14@5108.58,5958.47 5108.58,5910.78 v1@5110.9,5913.1 ; v1(6017.56,5800) 6020.18,5797.38 6020.18,5782.45 6137.28,5665.34 6137.28,5664.78 R3.2@6150,5664.78
  Bottom Layer w10: v1(5110,5912.2) 5110,5910 5220,5800 v1(6017.56,5800)
NetR4_S1_1: R4_S1.1 U1.28 | length 1631.9
  Top Layer w10: R4_S1.1@4616,6320 R4_S1.1@4616,6328.5 ; R4_S1.1@4616,6326 4607.99,6317.99 4607.99,6247.61 4727.1,6128.5 4754.23,6128.5 4769.57,6113.17 5256.16,6113.17 5329.33,6040 5492.12,6040 5496.3,6035.82 5496.3,6007.79 5512.22,5991.87 5512.22,5748.75 5559.12,5701.85 5625.33,5701.85 5690.65,5767.17 U1.28@5690.65,5814.25
NetR4_S2_1: R4_S2.1 U1.26 | length 1423.2
  Top Layer w10: R4_S2.1@4756,6328.5 4740,6312.5 4740,6255.6 4850.44,6145.17 5269.42,6145.17 5342.58,6072 5505.37,6072 5528.3,6049.07 5528.3,6021.04 5544.22,6005.12 5544.22,5762 5572.37,5733.85 5612.07,5733.85 5651.28,5773.06 U1.26@5651.28,5814.25
NetR4_S3_1: R4_S3.1 U1.24 | length 1199.8
  Top Layer w10: R4_S3.1@4906,6328.5 4897.99,6320.5 4897.99,6247.61 4968.44,6177.17 5282.67,6177.17 5355.84,6104 5522.97,6104 5560.3,6066.67 5560.3,6034.3 5576.22,6018.38 5576.22,5775.26 5585.63,5765.85 5598.82,5765.85 5611.91,5778.94 U1.24@5611.91,5814.25
NetR4_S4_1: R4_S4.1 U1.22 | length 710.3
  Top Layer w10: R4_S4.1@5056,6328.5 5055.5,6328.5 5033.28,6306.28 5033.28,6262.32 5086.44,6209.17 5295.93,6209.17 5369.09,6136 5536.22,6136 U1.22@5592.22,6080
NetR4_S5_1: R4_S5.1 U1.20 | length 613.9
  Top Layer w10: R4_S5.1@5206,6328.5 5192.8,6315.3 5192.8,6252.8 5204.44,6241.17 5309.18,6241.17 5382.35,6168 5581.84,6168 5631.59,6118.25 U1.20@5631.59,6080
NetR4_S6_1: R4_S6.1 U1.18 | length 502.5
  Top Layer w10: R4_S6.1@5356,6328.5 5347.99,6320.5 5347.99,6247.61 5395.6,6200 5595.1,6200 5670.96,6124.14 U1.18@5670.96,6080
NetR4_S7_1: R4_S7.1 U1.16 | length 390.9
  Top Layer w10: R4_S7.1@5506,6328.5 5497.99,6320.5 5497.99,6247.61 5504.44,6241.17 5601.46,6241.17 5710.41,6132.22 U1.16@5710.41,6085.78
NetR4_S8_1: R4_S8.1 U1.14 | length 294.1
  Top Layer w10: R4_S8.1@5656,6328.5 5647.99,6320.5 5647.99,6247.61 5750,6145.6 U1.14@5750,6080
NetR4_S9_1: R4_S9.1 U1.12 | length 256
  Top Layer w10: U1.12@5790,6080 5790,6315.5 R4_S9.1@5804.5,6330
NetR4_S10_1: R4_S10.1 U1.10 | length 296.4
  Top Layer w10: U1.10@5828.52,6085.75 5828.52,6145.89 5930,6247.37 5930,6305.5 R4_S10.1@5954.5,6330
NetR4_S11_1: R4_S11.1 U1.8 | length 389.3
  Top Layer w10: U1.8@5867.81,6080 5867.81,6139.93 5967.88,6240 6040.4,6240 6090.5,6290.1 6090.5,6319 6100,6328.5 R4_S11.1@6098.5,6330
NetR4_S12_1: R4_S12.1 U1.6 | length 493.5
  Top Layer w10: U1.6@5907.18,6080 5907.18,6134.04 5981.14,6208 6100.63,6208 6135.92,6243.29 6191.06,6243.29 6210,6262.23 6210,6294.13 R4_S12.1@6246.5,6330.63
NetR5_1: R5.1 U7.8 | length 98.3
  Top Layer w10: R5.1@4753.82,5253.88 4753.82,5157.11 U7.8@4754.91,5156.02
NetR7_3: R7.3 U5.8 | length 126.9
  Top Layer w10: R7.3@5112.36,4407.76 5152.24,4407.76 5152.24,4471.61 U5.8@5175.35,4471.61
NetR7_4: R7.4 U5.1 | length 91
  Top Layer w10: R7.4@5307.64,4407.76 5327.76,4407.76 5344.65,4424.65 U5.1@5344.65,4471.61
NetR9_2: R9.2 U1.39 | length 178.6
  Top Layer w10: U1.39@5907.18,5814.25 5907.18,5762.82 5960,5710 5960,5677.56 R9.2@5960,5657.56
NetR10_2: R10.2 U1.37 | length 171.6
  Top Layer w10: R10.2@5850,5650 5850,5677.56 5850,5690 5867.81,5707.81 U1.37@5867.81,5814.25
NetR12_2: R12.2 U1.38 | length 156
  Top Layer w10: U1.38@5887.5,5814.25 5887.5,5712.5 5910,5690 R12.2@5910,5667.56
NetR49_1: R49.1 SW1.1 U3.44 | length 431
  Top Layer w10: SW1.1@4709.29,5471.5 4801.5,5563.7 R49.1@4801.5,5570 4815.52,5584.02 5020.44,5584.02 5049.47,5613.06 5049.47,5616 5049.53,5616.06 U3.44@5049.53,5641.54
NetR50_1: R50.1 R51.2 U3.42 | length 1424.7
  Top Layer w10: U3.42@5010.16,5641.54 5010.16,5679.84 5030.32,5700 v1(5100,5700) ; v1(5340,5450) 5340,5347.01 5416.01,5271 5580.78,5271 5797.32,5054.46 v1(5976.26,5054.46)
  Bottom Layer w10: v1(5100,5700) 5140,5700 5340,5500 v1(5340,5450) ; R51.2@5976.26,4999.57 v1(5976.26,5054.46)
NetR54_1: R54.1 U7.28 | length 109.7
  Top Layer w10: R54.1@4832.07,4830.43 4833.65,4832.01 U7.28@4833.65,4939.49
NetR55_1: R55.1 R56.1 U7.18 | length 117.1
  Top Layer w10: R55.1@4520,5007.56 4520.83,5008.39 U7.18@4636.8,5008.39
NetR55_2: R55.2 R60.1 U7.17 | length 310.9
  Top Layer w10: R60.1@4512.44,4880 4512.44,4944.88 R55.2@4520,4952.44 4520,4960.51 4491.28,4989.22 4491.28,5025.89 4497.73,5032.34 4602.27,5032.34 4606.54,5028.07 U7.17@4636.8,5028.07
NetR62_1: R62.1 R64.2 U3.39 | length 1672.6
  Top Layer w10: v2(4850,5630) 4852.09,5630 4905.14,5683.05 4938.01,5683.05 4951.1,5669.96 U3.39@4951.1,5641.54
  Bottom Layer w10: R64.2@4544.88,4280 4542.44,4282.44 R62.1@4542.44,4340 4497.5,4384.94 4497.5,5197.5 4850,5550 v2(4850,5630)
NetR70_1: R70.1 U3.19 | length 1720.5
  Bottom Layer w10: R70.1@4630,4820 4555,4895 4555,5227.63 4882,5554.63 4882,5803.27 4858.76,5826.51 4858.76,6087.6 4883.66,6112.5 4997.6,6112.5 5022.5,6087.6 5022.5,6050.48 5009,6036.98 v2(5009,6000.77)
NetU1_43: U1.43 U3.16 U6.8 | length 2929.4
  Top Layer w10: U6.8@4917.38,4529.69 4988.28,4529.69 5221,4762.41 5221,5301.63 5175,5347.63 5175,5535 v1(5180,5540) ; U3.16@5069.21,5958.47 5069.21,5910.79 v1(5070,5910) ; U1.43@5985.92,5814.25 5985.92,5875.92 5989.64,5879.64 5990,5879.29 v1(5990,5870)
  Bottom Layer w10: v1(5070,5910) 5246,5734 6014.53,5734 6058.56,5778.03 6058.56,5816.98 5995.54,5880 5990,5874.46 v1(5990,5870) ; 5119,5858.39 5119,5773.14 5069,5723.14 5069,5683.02 5180,5572.02 v1(5180,5540)
NetU3_12: U3.12 U7.12 | length 1254.1
  Top Layer w10: v1(4675.57,5195.49) 4675.57,5156.61 U7.12@4676.17,5156.02 ; v1(4960,5890) 4975,5875 5114.36,5875 5147.62,5908.27 U3.12@5178.46,5908.27
  Bottom Layer w10: v1(4675.57,5195.49) 4680.57,5190.49 4735.93,5190.49 4755.26,5209.82 4755.26,5273.16 ; 4755.22,5273.2 5003.02,5521 5003.63,5521 5006,5523.37 5006,5728.02 5071,5793.02 5071,5828.39 5024.39,5875 4975,5875 v1(4960,5890)
NetU3_13: U3.13 U7.13 | length 1422.6
  Top Layer w10: v1(4580,5110) 4583.7,5110 4586.89,5106.81 U7.13@4636.8,5106.81 ; v1(4900,6010) 4901.36,6010 4918.86,6027.5 5012.14,6027.5 5039.64,6055 5080.36,6055 5128.27,6007.09 U3.13@5128.27,5958.47
  Bottom Layer w10: v1(4580,5110) 4581.07,5110 v1@4583.5,5107.56 ; v1@4587.93,5112.07 4580,5120 4580,5230 4898,5548 4898,5809.89 4884.95,5822.94 4884.95,5994.95 v1(4900,6010)
NetU3_18: U3.18 U8.5 | length 2992.1
  Top Layer w10: v1(5020,5900) 5020.2,5900 5020,5900.2 5030,5910.2 5030,5957.99 5029.84,5958.15 5030,5958.31 U3.18@5029.84,5958.47
  Bottom Layer w10: v1@5013.02,5893.02 5029,5893.02 5087,5835.02 5087,5786.39 5022,5721.39 5022,5516.75 5010.25,5505 5009.64,5505 4771.26,5266.61 4771.26,5196.85 4635.93,5061.52 4635.93,4906.56 4949.49,4593 5372.25,4593 5395.97,4569.28 5749.42,4569.28 5765,4553.7 5765,4448.66 5745.26,4428.92 5511.08,4428.92 5485,4455 U8.5@5485,4491.1
NetU3_29: U3.29 U7.9 | length 1014.6
  Top Layer w10: v1(4725.57,5215.49) 4735.22,5205.85 U7.9@4735.22,5156.02 ; U3.29@4861.54,5829.53 4909.95,5829.53 v1(4909.95,5833.29)
  Bottom Layer w10: v1(4725.57,5215.49) 4725.57,5266.19 4990,5530.61 4990,5734.64 5055,5799.64 5055,5821.76 5035.76,5841 4917.66,5841 v1(4909.95,5833.29)
NetU3_38: U3.38 U6.9 | length 2492.2
  Top Layer w10: U6.9@4917.38,4550.16 4986.13,4550.16 5205,4769.03 5205,5295 5156.2,5343.8 4675.42,5343.8 4630,5298.38 4630,5245.55 4613.77,5229.31 4506.23,5229.31 4491.5,5244.05 4491.5,5490.34 4601.84,5600.69 4823.77,5600.69 4824.43,5600.02 4924.62,5600.02 4931.42,5606.82 U3.38@4931.42,5641.54
NetU3_40: U3.40 U8.7 | length 2367.3
  Top Layer w10: U3.40@4970.79,5641.54 4970.79,5712.36 4990,5731.58 v1(4990,5800)
  Bottom Layer w10: v1(4990,5800) 4930,5740 4930,5493.24 4626.57,5189.81 4626.57,5088.51 4619.93,5081.86 4619.93,4899.93 4942.86,4577 5365.63,4577 5389.34,4553.28 5545.26,4553.28 5585,4513.55 U8.7@5585,4491.1
NetU3_41: U3.41 U8.3 | length 2251.1
  Top Layer w10: U3.41@4990.47,5641.54 4991,5642.06 4991,5709.95 5030,5748.95 v1(5030,5810)
  Bottom Layer w10: v1(5030,5810) 5015,5825 4979.64,5825 4914,5759.36 4914,5541.37 4610,5237.37 4610,5094.56 4603.93,5088.49 4603.93,4893.31 4937.24,4560 5360,4560 U8.3@5380,4540
NetU5_5: U5.5 U6.3 | length 80.5
  Top Layer w10: U6.3@5102.62,4529.69 5130.76,4529.69 5149.45,4548.39 U5.5@5175.35,4548.39
NTC1: C1.2 JP6.2 R6.1 U1.32 | length 1033.3
  Top Layer w10: JP6.2@5228.74,6070 5240,6070 5340,5970 5402.61,5970 5496.22,5876.39 5496.22,5742.12 5530,5708.34 5530,5640 5558.5,5611.5 C1.2@5558.5,5600 ; C1.2@5569.25,5599.25 5592.5,5576 5592.64,5576 5592.75,5575.89 5640.08,5575.89 5643.5,5579.31 5643.77,5579.31 5660,5595.55 5660,5650 5690,5680 R6.1@5708.5,5680 5708.5,5708.5 5769.39,5769.39 U1.32@5769.39,5814.25
NTC2: C3.2 JP7.2 R4.1 U1.33 | length 1405.3
  Top Layer w10: JP7.2@4980,6070 4981,6071 5089,6071 5107.5,6052.5 5107.5,6052.4 5132.4,6027.5 5248.75,6027.5 5322.25,5954 5395.98,5954 5429.31,5920.67 5429.31,5826.31 5439.72,5815.9 5447.65,5815.9 5480.22,5783.34 5480.22,5735.49 5514,5701.71 5514,5601.55 5555.55,5560 5586.01,5560 5586.12,5559.89 5646.71,5559.89 5646.81,5560 5708.5,5560 ; C3.2@5708.5,5520 5708.5,5560 ; U1.33@5789.15,5809.15 5789.15,5766.52 5737.22,5714.59 5737.22,5648.72 5708.5,5620 R4.1@5708.5,5600 5708.5,5560
POWER_GATE: Q21.2 U8.16 | length 385.9
  Bottom Layer w10: Q21.2@5199.51,4095 5199.59,4095 5260.22,4155.63 5260.22,4176.56 5274.74,4191.08 5295.26,4191.08 5295.47,4190.88 5295.67,4191.08 5461.13,4191.08 5485,4167.2 U8.16@5485,4128.9
PRECHARGE: Q23.1 U8.14 | length 671.7
  Bottom Layer w10: U8.14@5585,4106.45 U8.14@5585,4128.9 5585,4167.2 5608.87,4191.08 5768.92,4191.08 5785.53,4174.47 6036.76,4174.47 6036.76,4175.42 6037.71,4175.42 6047,4184.71 6047,4190.56 6066.44,4210 6156.77,4210 Q23.1@6159.37,4207.4
USB_DM: R15.1 U3.32 | length 109.3
  Top Layer w10: R15.1@4781.5,5830 4781.5,5822.09 4833.11,5770.47 U3.32@4861.54,5770.47
USB_DP: R16.1 U3.33 | length 80.4
  Top Layer w10: R16.1@4781.5,5750 4782.28,5750.79 U3.33@4861.54,5750.79
V-: C2.1 R11.2 U1.30 | length 681.2
  Top Layer w10: R11.2@5617.56,5660 5730,5772.44 5730,5885.36 5874.64,6030 6010.6,6030 6050,6069.4 C2.1@6050,6082.44
VBB: Q13.2 Q19.3 Q23.2 R7.2 R60.2 U7.20 | length 1997.9
  Top Layer w10: R60.2@4563.82,4873.88 4613.88,4873.88 4665.57,4925.57 v2(4665.57,4935.49) ; R7.2@5307.64,4244.96 5307.64,4302.36 5290,4320 5290,4344.29 5248.61,4385.68 5248.61,4429.83 5260,4441.23 5260,4610 v2(5310,4660) ; Q13.2@5564.49,4280 5704.49,4140 v2(5800,4140)
  Bottom Layer w10: v2(4665.57,4935.49) 4738.2,4935.49 4788.2,4885.49 Q19.3@4976.56,4885.49 ; 5050,4830 5132.02,4912.02 5208.06,4912.02 5310,4810.08 v2(5310,4660) ; v2(5800,4140) 6046,4140 Q23.2@6076,4170
VCC: C6.1 C7.1 C11.2 C14.2 C22.2 C26.2 C30.2 C31.2 C43.2 C46.2 C47.2 D5.1 JP3.1 JP5.2 L2.2 SW1.4 U2.5 U3.1 U3.9 U3.24 U3.36 U3.48 U4.3 U5.6 U5.7 U6.1 U6.2 | length 6463
  Top Layer w10: JP5.2@4540,4431.26 4518.74,4431.26 4475.5,4474.5 4475.5,4982.38 4475.28,4982.6 4475.28,5032.52 4475.5,5032.74 4475.5,5985.5 4560,6070 JP3.1@4572.52,6070 ; JP3.1@4590.69,6070 4575.34,6085.34 4602.5,6112.5 4747.6,6112.5 4772.5,6087.6 4772.5,6040.49 4851.5,5961.5 4851.5,5960 C30.2@4801.5,5960 ; C46.2@4801.5,5640 4811.5,5650 4819.8,5650 U3.36@4861.54,5691.73 4891.2,5691.73 4965,5765.54 ; 4852.99,5960 4910.2,5960 U3.24@4911.73,5958.47 4911.73,5928.81 4935,5905.54 4935,5845 4965,5815 4965,5765.54 ; SW1.4@4870.71,5408.5 4882.89,5420.69 4970,5420.69 ; 4942.05,5742.59 4965,5765.54 ; 4965,5810.36 5003.86,5849.21 5249.29,5849.21 C47.2@5250,5848.5 ; U4.3@5022.67,5502.8 5006.81,5502.8 4970,5465.98 4970,5420.69 ; U6.1@5102.62,4490.32 U6.2@5102.62,4510 ; 5128.27,5850 5128.27,5713.51 ; U5.7@5175.35,4497.2 U5.6@5175.35,4522.8 ; C14.2@5190,5642.99 5190,5690 5188.27,5691.73 5150.04,5691.73 5128.27,5713.51 ; U2.5@6200,5852.05 6222.05,5852.05 C11.2@6295,5925 ; C11.2@6310,5940 6310,6063.23 6350,6103.23 D5.1@6350,6223.74 ; 4970,5420.69 5000.78,5420.69 5031.46,5390 C26.2@5041.5,5390 5054.14,5390 5109.31,5445.18 5109.31,5500.78 5128.27,5519.73 U3.48@5128.27,5641.54 5128.27,5713.51
  Bottom Layer w10: JP5.2@4540,4431.26 4561.26,4431.26 4605,4475 4605,4490.36 4670,4555.36 4670,4635.36 4719.64,4685 4789.61,4685 4953.11,4521.5 C22.2@5040,4521.5 5041.5,4522.99 C43.2@5160,4522.99 ; C43.2@5153.78,4517.72 C7.1@5215,4517.72
  Bottom Layer w20: v2(5250,5870) 5830,5870 5930,5970 6250,5970 v2(6290,5930) v2(6320,5930) v2(6350,5930)
  other v2: 5140,4500
VDD: C9.2 C12.2 C13.2 JP4.2 L1.1 Q21.1 Q24.2 U2.2 U2.3 U8.11 U8.15 U8.17 U8.19 U8.20 | length 3532.6
  Top Layer w15: 6150,5852.05 6150,5760 C9.2@6225,5685 ; C9.2@6230.94,5719.06 C9.2@6230.94,5710 6230.94,5690.53 6310,5611.48 6310,5510 L1.1@6330.87,5510
  Bottom Layer w10: U8.17@5435,4120 5435,4101 5469.28,4066.72 5495.26,4066.72 5535,4106.45 U8.15@5535,4128.9
  Bottom Layer w15: JP4.2@4760,4490 4760,4480 4660,4380 4660,4110.3 4702.33,4067.98 4962.92,4067.98 ; 4962.95,4068 4970.34,4068 5157.98,4067.98 5160,4070 5160,4115 Q21.1@5182.5,4137.5 ; C13.2@6010,4070 6295.39,4070 6360,4134.61 6360,5460 6335,5485 v2@6325,5485 ; Q24.2@6224.12,5118.4 6360,5118.4
  other v2: 6330,5490
VOUT: C33.1 C39.2 C41.2 D4.1 JP4.3 Q17.3 Q21.3 Q24.3 R57.2 R58.2 R61.2 R67.2 | length 3473.4
  Top Layer w10: R57.2@4608.02,4601.98 R57.2@4608.02,4615.49 4615.49,4615.49 4627.2,4627.2 R58.2@4627.2,4692.39 ; v1(5557.19,4675.54) 5632.73,4600 5754.06,4600 v2(5770,4584.06)
  Top Layer w15: C39.2@4536.26,4752.39 C41.2@4536.26,4692.39 R58.2@4627.2,4692.39 ; R57.2@4608.02,4601.98 4625.72,4584.28 4698.97,4584.28 4775.49,4660.79 5030.87,4660.79 v1(5045.57,4675.49) ; C33.1@5405.57,4625.49 5405.57,4643.84 v1(5512.76,4751.03) ; v1(5592.76,4751.03) 5573.83,4769.96 5599.96,4769.96 5740,4910 v1(5940,4910)
  Bottom Layer w15: v2(4755.57,4655.49) 4820,4591.07 4820,4461.26 JP4.3@4770,4411.26 4742.17,4411.26 4681,4350.09 4681,4119 4711.02,4088.98 4954.23,4088.98 4979.04,4089 Q21.3@5018.98,4088.98 ; v1(5045.57,4675.49) 5091.63,4629.44 5359.52,4629.44 5385.58,4655.49 5385.58,4741.95 ; v2(5770,4584.06) D4.1@5828.57,4525.49 ; v1(5940,4910) 6050.59,4910 6060.59,4920 6139.68,4920 R67.2@6190.2,4970.52 6190.2,5022.02 Q24.3@6181.69,5030.52
  other v1: 5512.76,4631.03 5512.76,4671.03 5597.19,4675.54 5512.76,4711.03 5557.19,4715.54 5597.19,4715.54 5557.19,4755.54
VREG: C4.2 R1.1 R2.1 R3.1 R9.1 R10.1 R12.1 U1.35 U1.36 U1.40 | length 897.4
  Top Layer w10: R10.1@5830,5612.44 R12.1@5890,5612.44 ; U1.40@5926.87,5814.25 5926.87,5849.56 5906.43,5870 5866.58,5870 5848.13,5851.55 5848.13,5810 5828.52,5810 5828.52,5733 5807.86,5712.34 5807.73,5712.34 5801.28,5705.9 5801.28,5669.22 5801.38,5669.13 5801.38,5648.62 5840,5610 R1.1@6010,5610 ; C4.2@5978.5,5520 6010,5551.5 6010,5610.95 6138.72,5610.95 R3.1@6150,5599.66
WS2812: JP3.2 U3.27 | length 322.5
  Top Layer w10: JP3.2@4651.26,6070 4693.76,6027.5 4723.96,6027.5 4770,5981.46 4770,5932.01 4833.12,5868.9 U3.27@4861.54,5868.9
pads on no net: D20.2 JP8.ID JP8.VBUS SW1.2 SW1.3 SW2.2 SW2.3 U1.1 U1.2 U1.3 U2.7 U2.8 U3.2 U3.3 U3.4 U3.10 U3.11 U3.20 U3.21 U3.22 U3.25 U3.26 U3.28 U3.30 U3.31 U3.34 U3.37 U3.43 U4.5 U4.8 U5.4 U7.15 U7.16 U7.25 U8.2 U8.4 U8.6 U8.8 U8.9 U8.12 U8.13

## Polygon pours and split planes (outlines as drawn)
GND on Bottom Layer "pOWER" (solid, remove dead copper, pour order 26): 4950,4530 4950,4130 6080,4130 6080,4530
C+ on Bottom Layer "Power" (solid, pour order 22): 5370,5590 6100,5590 6160,5650 6160,5520 5370,5520
GND on Bottom Layer "Bottom GND" (solid, remove dead copper, pour order 24): 4450,4040 6390,4040 6390,6930 4450,6930
VDD on Bottom Layer "Power" (solid, pour order 0): 5280,4180 5210,4250 5150,4250 5150,4120 5150,4040 6014.58,4040 6030,4110 5827.23,4180
GND on Top Layer "Top Layer-No Net" (solid, remove dead copper, pour order 23): 4450,4040 6390,4040 6390,6930 4450,6930
L+ on Top Layer "Power" (solid, pour order 16): 5800,4510 5850,4510 5910,4450 5930,4450 5930,4380 5880,4330 5800,4410 5800,4470
VBB on Top Layer "Power" (solid, pour order 14): 5350,4350 5410,4410 5410,4080 5350,4140
B+ on Top Layer "Power" (solid, pour order 12): 4920,4070 5040,4070 5040,4410 4920,4410 4820,4320 4870,4070
NetF1_2 on Top Layer "Power" (solid, pour order 10): 4960,4310 5030,4310 5070,4350 5160,4350 5160,4150 5150,4140 5070,4140 5040,4170 4960,4170
L+ on Top Layer "Power" (solid, pour order 6): 5880,4160 5880,4450 6030,4450 6100,4520 6280,4520 6280,4300 6140,4160 6050,4160
GND on Top Layer "Power" (solid, pour order 28): 6256.85,5843.58 6378.78,5843.58 6378.78,5548.97 6323.76,5548.97 6323.76,5616.24 6240,5700 6240,5780

## Keep-outs
Keep-Out Layer:
  lines w10: 4450,4130 4540,4040 4900,4040 6300,4040 6390,4130 6390,6840 6320,6910 6300,6930 4540,6930 4450,6840 4450,4130

## Other copper
Top Layer:
  rectangle net L+: 6100,4270 6340,4520
  rectangle net B+: 4680,4070 4920,4320
  region net GND: 5580.68,4816.89 5580.68,5255.54 5367.19,5255.54 5367.19,4816.89
  region net VOUT: 5617.19,4595.54 5617.19,4785.54 5380,4785.54 5380,4595.54
  rectangle net VCC: 6300,5940 6370,6040
  rectangle net NetL2_1: 6110,5920 6120,6020
  rectangle net NetL2_1: 6110,5950 6220,6070
  rectangle net GND: 5340,5070 5450,5260
Bottom Layer:
  rectangle net C+: 6160,5510 6350,5650
  rectangle net GND: 6160,5680 6350,5820
  rectangle net GND: 4710,4110 4950,4360
  rectangle net GND: 6090,4280 6330,4530
  rectangle net NetC40_2: 5970,4520 6040,4680
  rectangle net C+: 5370.56,5393.82 5450,5560
  region net NetQ15_2: 5510.68,5268.39 5510.68,5350 5360.68,5350 5360.68,5268.39
  region net NetQ15_2: 5617.19,5335.54 5617.19,5455.54 5480,5455.54 5480,5335.54
  region net NetC32_2: 6317.19,5305.54 6317.19,5455.54 5657.19,5455.54 5657.19,5305.54
  region net NetC32_2: 5910.68,5055.54 5910.68,5225.54 5560.68,5225.54 5560.68,5055.54
  region net NetC32_2: 6317.19,5225.54 6317.19,5305.54 5750,5305.54 5750,5225.54
  region net NetC40_2: 5920,4630 5920,4996.89 5667.19,4996.89 5667.19,4630
  region net NetC40_2: 6317.19,4605.54 6317.19,4816.89 5740,4816.89 5740,4605.54
  region net GND: 5457.19,4825.54 5457.19,5090 5367.19,5090 5367.19,4825.54
  region net NetC34_1: 5540,5105.54 5540,5180 5367.19,5180 5367.19,5105.54
  region net NetC34_1: 5540,5040 5540,5120 5480,5120 5480,5040
  region net GND: 5517.19,4825.54 5517.19,4960 5457.19,4960 5457.19,4825.54
  region net VOUT: 5622.18,4630 5622.18,4776.89 5340,4776.89 5340,4630
  region net NetQ19_3: 5160,4900 5200,4900 5200,4860 5230,4830 5290,4770 5290,4700 5230,4700 5230,4760 5180,4760 5160,4780
  pour cut-out: 4960,4430 5325.37,4430 5328.66,4434.79 5320.74,4440 4960,4440

## Silkscreen, mask and mechanical layers (free items; w line width, h text height)
Top Overlay:
  lines w5: 4545,4945 4545,5030 4490,5030 4490,4855 4590,4855 4590,4890 4590,4905 4565,4905
  text "N" at 4460,5260 h70 r180
  text "L+" at 6280,4540 h30
  text "B+" at 4620,4070 h30
Bottom Overlay:
  text "C-" at 6300,5840 h30
  text "battman v3.0" at 5950,5820 h90
  text "raphael chang & brent yi" at 5960,5720 h40
  text "C+" at 6300,5460 h30
  text "L-" at 6220,4540 h30
  text "B-" at 4750,4070 h30